# Altium PCB CW308T_K24F.PcbDoc
Units mil, origin at the board's own origin, x right, y up, seen from the top; angles counter-clockwise.
Board outline 2055 x 2540 mil, 2 copper layers (Component Side, Bottom Layer), stack 12.8 mil thick; 30 components, 81 nets, 269 pads, 89 vias.
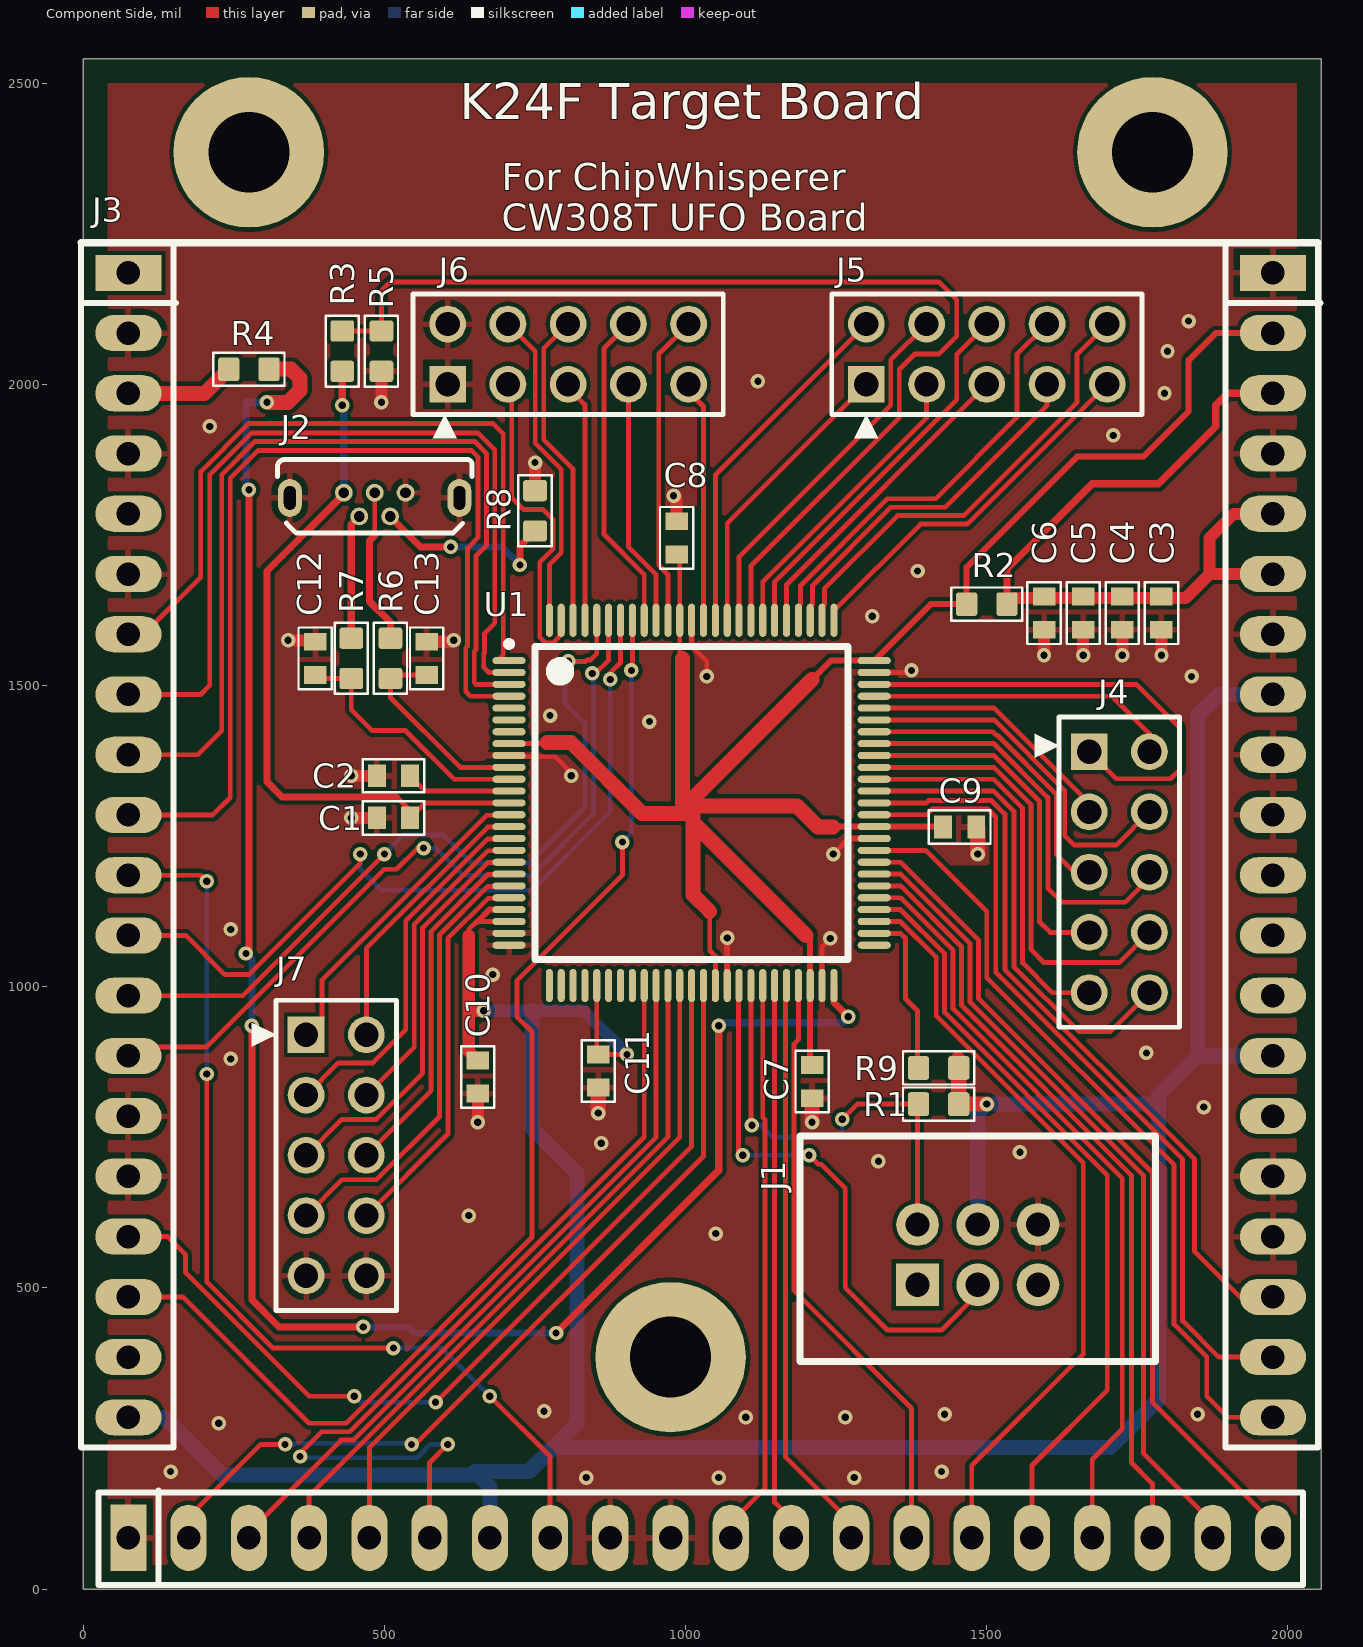
[diagram p0: Component Side view]
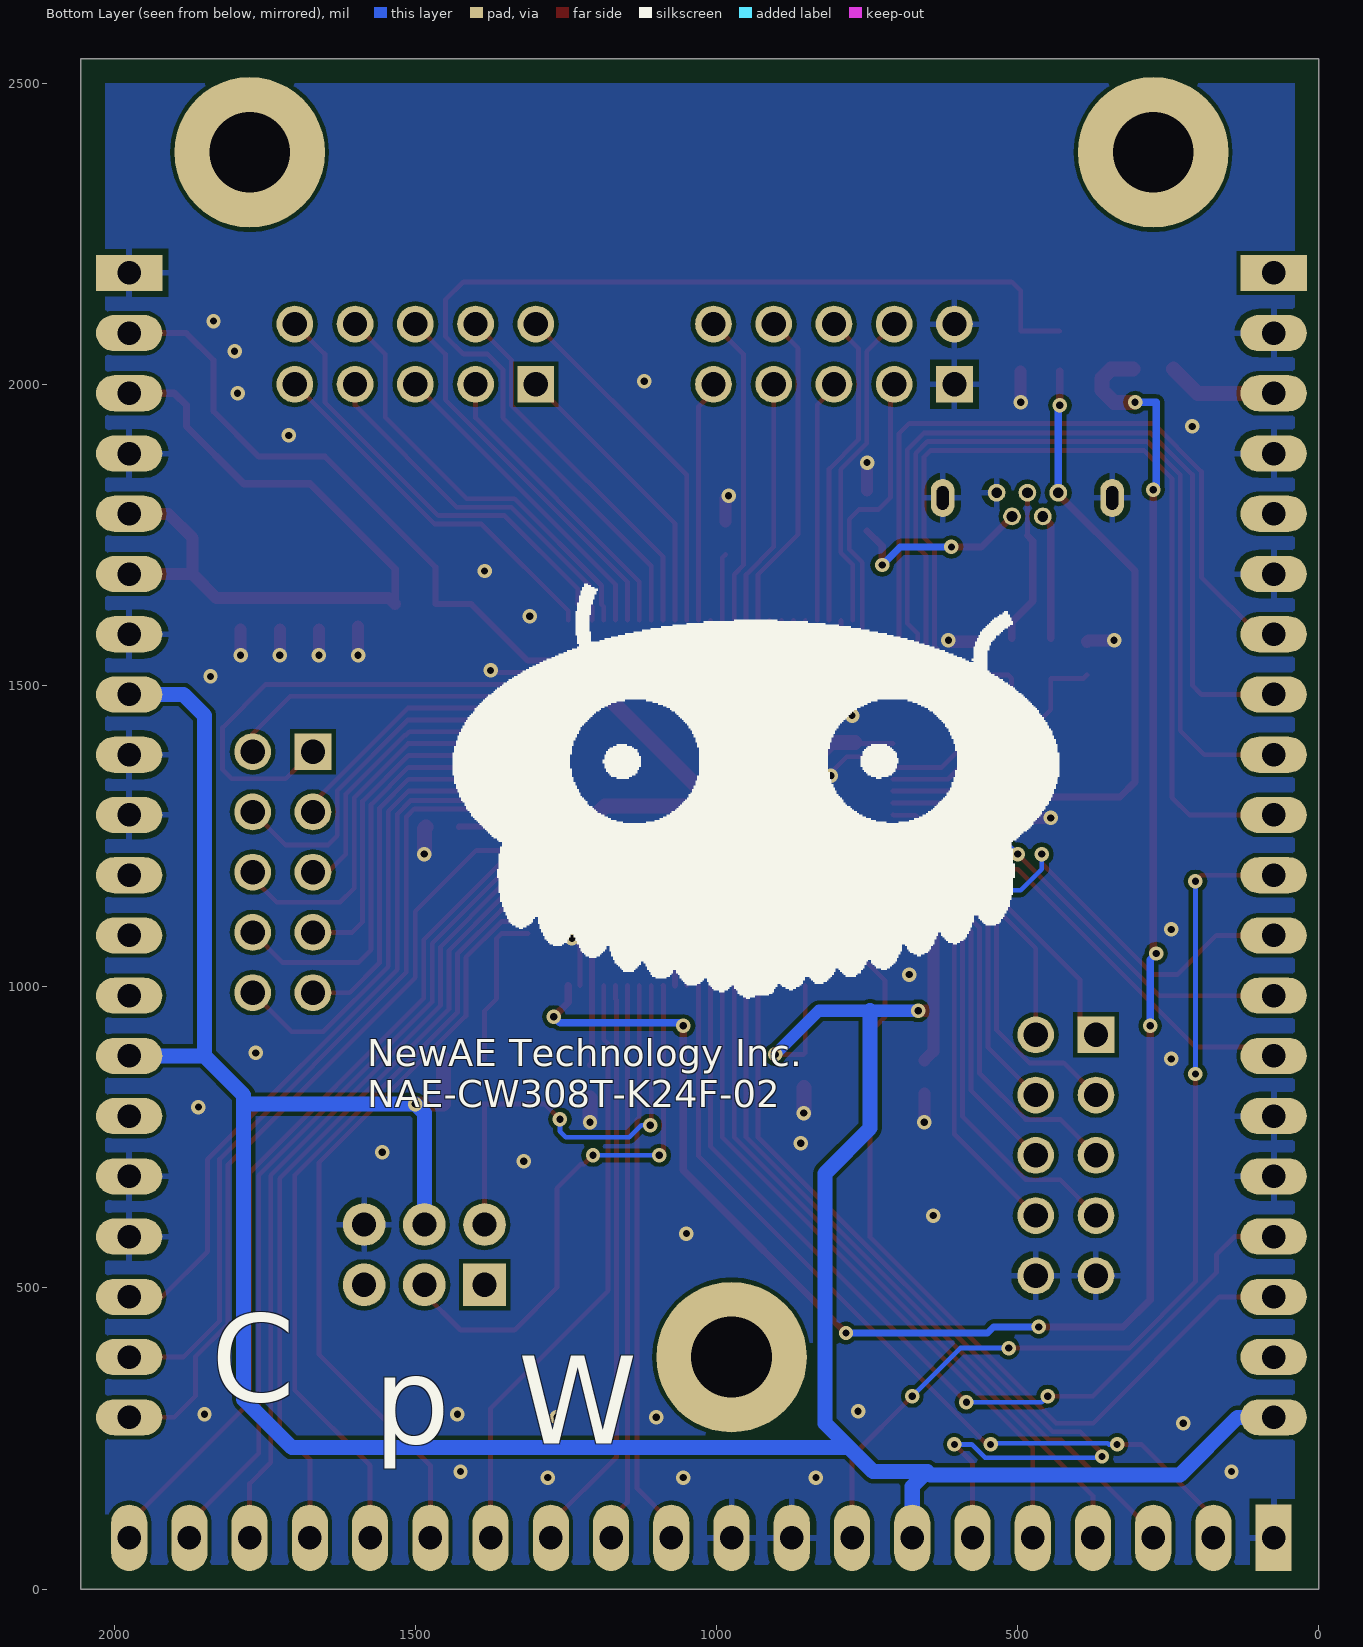
[diagram p1: Bottom Layer view, seen from below]

## Layer stack, top to bottom
Top Solder: solder mask 0.4, Solder Resist, Dk 3.5
Component Side: signal copper 1.4
Dielectric 1: core 10, FR-4, Dk 4.2
Bottom Layer: signal copper 1.4
Solder Side: solder mask 0.4, Solder Resist, Dk 3.5

## Board outline
0,0 2055,0 2055,2540 0,2540

## Design rules (kind name [scope] priority, off if disabled: settings)
BoardOutlineClearance Silk_to_Outline [(OnLayer('Top Overlay'))] p1: gap=0 ignorepadtopadclearanceinfootprint=FALSE
BoardOutlineClearance [All] p2: gap=40 ignorepadtopadclearanceinfootprint=FALSE
Clearance Clearance_Power [InNet('+*') OR InNet('-*') OR InNet('GND')] p1: gap=7 ignorepadtopadclearanceinfootprint=FALSE
Clearance [All] p2: gap=6 ignorepadtopadclearanceinfootprint=FALSE except(0: Arc-Hole Track-Hole SMDPad-Hole THPad-Hole Via-Hole Fill-Hole Poly-Hole Region-Hole Text-Hole)
HoleSize [All] p1: absolutevalues=TRUE maxlimit=200 minlimit=1 maxpercent=80.000 minpercent=20.000
MinimumSolderMaskSliver [All] p1: minsoldermaskwidth=5
PlaneConnect PlaneConnect_viaDirect [IsVia] p1: planeconnectstyle=Direct reliefexpansion=20 reliefentries=4 reliefconductorwidth=10 reliefairgap=10
PlaneConnect [All] p2: planeconnectstyle=Relief reliefexpansion=20 reliefentries=4 reliefconductorwidth=10 reliefairgap=10
PolygonConnect PolygonConnect_viaDirect [All vs isVia] p1: connectstyle=Direct reliefconductorwidth=10 reliefentries=4 polygonreliefangle="90 Angle" airgapwidth=10
PolygonConnect [All] p2: connectstyle=Relief reliefconductorwidth=10 reliefentries=4 polygonreliefangle="90 Angle" airgapwidth=10
RoutingVias [All] p1: holewidth=28 width=24 viastyle="Through Hole" minholewidth=12 minwidth=24 maxholewidth=12 maxwidth=50
SilkToSilkClearance [All] p1: silktosilkclearance=5
SilkToSolderMaskClearance [IsPad] p1: minsilkscreentomaskgap=5 clearancetoexposedcopper=TRUE
SolderMaskExpansion [All] p1: expansion=4
Width [All] p1: maxlimit=100 minlimit=6 preferedwidth=8 minimp=50.000000 maximp=50.000000 favimp=50.000000
25 further rules are at their usual default settings.

## Classes and differential pairs
component class CW308T_K24_Micro: J1 J4 J5 J6 J7 R1 U1 U?
component class CW308T_K24_UFO: J3
component class CW308T_K24_Misc: C1 C2 C3 C4 C5 C6 C7 C8 C9 C10 C11 C12 C13 C17 J2 R2 R3 R4 R5 R6 R7 R8 R9 U?

## Components (designator, comment, footprint, x,y, rotation, side; value= is the part's Value field where it differs from the comment)
C1 "2u2" CAPC0603_M 515,1280 r180 top
C2 "2u2" CAPC0603_M 515,1350 r180 top
C3 "2u2" CAPC0603_M 1790,1620 r270 top
C4 "2u2" CAPC0603_M 1725,1620 r270 top
C5 "100n" CAPC0603_M 1660,1620 r270 top
C6 "100n" CAPC0603_M 1595,1620 r270 top
C7 "100n" CAPC0603_M 1210,842.44 r270 top
C8 "100n" CAPC0603_M 985,1745 r90 top
C9 "100n" CAPC0603_M 1455,1265 r0 top
C10 "100n" CAPC0603_M 655,850 r270 top
C11 "100n" CAPC0603_M 855,860 r270 top
C12 "47p" CAPC0603_M 385,1545 r90 top
C13 "47p" CAPC0603_M 570,1545 r90 top
J1 "HDR, Male, 6-Pin, 2 Row, Shrouded" HDR_6PIN_2ROW_SHROUD 1485,555 r90 top
J2 "614105150721" 614105150721 432.64,1820 r0 top
J3 "CW308_TARGETCON" CW308_TBOARD_CONN 75,2185 r0 top locked
J4 "MTSW-105-07-L-D-230" SMTC-MTSW-105-07-X-D-230 1670,1390 r270 top
J5 "MTSW-105-07-L-D-230" SMTC-MTSW-105-07-X-D-230 1300,2000 r0 top
J6 "MTSW-105-07-L-D-230" SMTC-MTSW-105-07-X-D-230 605,2000 r0 top
J7 "MTSW-105-07-L-D-230" SMTC-MTSW-105-07-X-D-230 370,920 r270 top
R1 "10k" RESC1608X55N 1420,805 r0 top
R2 "10R" RESC1608X55N 1500,1635 r180 top
R3 "47k" RESC1608X55N 430,2055 r90 top
R4 "10R" RESC1608X55N 275,2025 r180 top
R5 "68k" RESC1608X55N 495,2055 r270 top
R6 "33R" RESC1608X55N 510,1545 r90 top
R7 "33R" RESC1608X55N 445,1545 r270 top
R8 "1k5" RESC1608X55N 750,1790 r90 top
R9 "10k" RESC1608X55N 1420,865 r0 top
U1 "MK24FN1M0VLL12" SQFP50P1600X1600X170-100N 1010,1305 r0 top

## Footprints (in the part's own frame and the unit in brackets; to place one, negate y for a bottom-side part, rotate by r counter-clockwise, add the part's x,y. Pads: shape width x height; smd on the part's side, far side on the other; paste and mask are expansions set on the pad)
614105150721 [mm] "Upright USB"
  round 0.75 hole 0.45: 1(0,0) 2(0.65,-1) 3(1.3,0) 4(1.95,-1) 5(2.6,0)
  rrect100% 1x1.6 hole 0.5 slot 1 at 90 deg: S1(-2.275,-0.22) S2(4.875,-0.22)
  silkscreen extent -2.8,-1.7 5.4,1.4, body extent -2.7,-1.6 5.3,1.3, height 5.66
CAPC0603_M [mm]
  rect 0.75x0.95 smd: 1(-0.7,0) 2(0.7,0)
  silkscreen extent -1.3,-0.7 1.3,0.7, body extent -0.85,-0.45 0.85,0.45, height 0.9
CW308_TBOARD_CONN [mil]
  rect 110x60 hole 39: A1(0,0) C1(1900,0)
  oval 110x60 hole 39: A2(0,-100) A3(0,-200) A4(0,-300) A5(0,-400) A6(0,-500) A7(0,-600) A8(0,-700) A9(0,-800) A10(0,-900) A11(0,-1000) A12(0,-1100) A13(0,-1200) A14(0,-1300) A15(0,-1400) A16(0,-1500) A17(0,-1600) A18(0,-1700) A19(0,-1800) A20(0,-1900) C2(1900,-100) C3(1900,-200) C4(1900,-300) C5(1900,-400) C6(1900,-500) C7(1900,-600) C8(1900,-700) C9(1900,-800) C10(1900,-900) C11(1900,-1000) C12(1900,-1100) C13(1900,-1200) C14(1900,-1300) C15(1900,-1400) C16(1900,-1500) C17(1900,-1600) C18(1900,-1700) C19(1900,-1800) C20(1900,-1900)
  rect 60x110 hole 39: B1(0,-2100)
  oval 60x110 hole 39: B2(100,-2100) B3(200,-2100) B4(300,-2100) B5(400,-2100) B6(500,-2100) B7(600,-2100) B8(700,-2100) B9(800,-2100) B10(900,-2100) B11(1000,-2100) B12(1100,-2100) B13(1200,-2100) B14(1300,-2100) B15(1400,-2100) B16(1500,-2100) B17(1600,-2100) B18(1700,-2100) B19(1800,-2100) B20(1900,-2100)
  round 250 hole 134: MH1(200,200) MH2(900,-1800) MH2(1700,200)
  silkscreen extent -79,-2179 1979,50, body extent -50,-2149 1950,50, height 48
HDR_6PIN_2ROW_SHROUD [mm] "6-pin header, male, with shroud"
  rect 1.8x1.8 hole 1.02: 1(-1.27,2.54)
  round 1.8 hole 1.02: 2(1.27,2.54) 3(-1.27,0) 4(1.27,0) 5(-1.27,-2.54) 6(1.27,-2.54)
  silkscreen extent -4.5,-7.5 5,7.5, body extent -4.44,-7.41 4.83,7.42, height 9.32
RESC1608X55N [mm] "Chip Resistor, Body 1.6x0.8mm, EIA 0603, IPC Medium Density"
  round 0.254 on Mech15: 0(0,0)
  rrect25% 0.9x1 smd: 1(-0.85,0) 2(0.85,0)
  Component Side pour cut-out: -0.6,0.5 0.6,0.5 0.6,-0.5 -0.6,-0.5
  silkscreen extent -1.5,-0.7 1.5,0.7, body extent -0.87,-0.47 0.88,0.48, height 0.54
SMTC-MTSW-105-07-X-D-230 [mm] "Assembly .025\" [.64] SQ Post Terminal Strip, 2x5 Pins, Vertical, 2.54mm Pitch, Male"
  rect 1.55x1.55 hole 1.02: 1(0,0)
  round 1.55 hole 1.02: 2(0,2.54) 3(2.54,0) 4(2.54,2.54) 5(5.08,0) 6(5.08,2.54) 7(7.62,0) 8(7.62,2.54) 9(10.16,0) 10(10.16,2.54)
  silkscreen extent -1.46,-1.27 11.62,3.81, body extent -1.27,-1.27 11.43,3.81, height 8.38
SQFP50P1600X1600X170-100N [mm] "SQFP, 100-Leads, Body 14.00x14.00mm, Pitch 0.50mm, IPC Medium Density"
  oval 1.4x0.3 smd paste-0.051: 1(-7.7,6) 2(-7.7,5.5) 3(-7.7,5) 4(-7.7,4.5) 5(-7.7,4) 6(-7.7,3.5) 7(-7.7,3) 8(-7.7,2.5) 9(-7.7,2) 10(-7.7,1.5) 11(-7.7,1) 12(-7.7,0.5) 13(-7.7,0) 14(-7.7,-0.5) 15(-7.7,-1) 16(-7.7,-1.5) 17(-7.7,-2) 18(-7.7,-2.5) 19(-7.7,-3) 20(-7.7,-3.5) 21(-7.7,-4) 22(-7.7,-4.5) 23(-7.7,-5) 24(-7.7,-5.5) 25(-7.7,-6) 51(7.7,-6) 52(7.7,-5.5) 53(7.7,-5) 54(7.7,-4.5) 55(7.7,-4) 56(7.7,-3.5) 57(7.7,-3) 58(7.7,-2.5) 59(7.7,-2) 60(7.7,-1.5) 61(7.7,-1) 62(7.7,-0.5) 63(7.7,0) 64(7.7,0.5) 65(7.7,1) 66(7.7,1.5) 67(7.7,2) 68(7.7,2.5) 69(7.7,3) 70(7.7,3.5) 71(7.7,4) 72(7.7,4.5) 73(7.7,5) 74(7.7,5.5) 75(7.7,6)
  oval 0.3x1.4 smd paste-0.051: 26(-6,-7.7) 27(-5.5,-7.7) 28(-5,-7.7) 29(-4.5,-7.7) 30(-4,-7.7) 31(-3.5,-7.7) 32(-3,-7.7) 33(-2.5,-7.7) 34(-2,-7.7) 35(-1.5,-7.7) 36(-1,-7.7) 37(-0.5,-7.7) 38(0,-7.7) 39(0.5,-7.7) 40(1,-7.7) 41(1.5,-7.7) 42(2,-7.7) 43(2.5,-7.7) 44(3,-7.7) 45(3.5,-7.7) 46(4,-7.7) 47(4.5,-7.7) 48(5,-7.7) 49(5.5,-7.7) 50(6,-7.7) 76(6,7.7) 77(5.5,7.7) 78(5,7.7) 79(4.5,7.7) 80(4,7.7) 81(3.5,7.7) 82(3,7.7) 83(2.5,7.7) 84(2,7.7) 85(1.5,7.7) 86(1,7.7) 87(0.5,7.7) 88(0,7.7) 89(-0.5,7.7) 90(-1,7.7) 91(-1.5,7.7) 92(-2,7.7) 93(-2.5,7.7) 94(-3,7.7) 95(-3.5,7.7) 96(-4,7.7) 97(-4.5,7.7) 98(-5,7.7) 99(-5.5,7.7) 100(-6,7.7)
  silkscreen extent -7.82,-6.6 6.6,6.82, body extent -8,-8 8,8, height 1.7

## Part data
C1 C2 C3 C4: library part CCHIP-2u2-0603, "2u2, 0603", Case-EIA=0603, Case-Metric=1608, Manufacture 1=Samsung, Manufacture Part Number 1=CL10B225KP8NNNC, Rated Voltage=10VDC, Supplier Part Number 1=1276-1134-2-ND, Component Group=Capacitor, Component Type=Standard, Mounting Technology=SMT, Part Number=CCHIP-2u2-0603, Pin Count=2, Supplier 1=Digi-Key
C5 C6 C7 C8 C9 C10 C11: library part CCHIP-100n-0603, "100n, 0603", Case-EIA=0603, Case-Metric=1608, Manufacture 1=Kemet, Manufacture Part Number 1=C0603C104K5RACTU, Rated Voltage=50VDC, Supplier Part Number 1=399-5089-2-ND, Component Group=Capacitor, Component Type=Standard, Mounting Technology=SMT, Part Number=CCHIP-100n-0603, Pin Count=2, Supplier 1=Digi-Key
C12 C13: library part CCHIP-47p-0603, "47p, 0603", Case-EIA=0603, Case-Metric=1608, Component Group=Capacitor, Component Type=Standard, Mounting Technology=SMT, Part Number=CCHIP-47p-0603, Pin Count=2
J1: library part HDR_6PIN_2ROW_SHROUD, Manufacture 1="FCI Connectors", Manufacture Part Number 1=75869-131LF, Supplier Part Number 1=609-2845-ND, Component Group=Connector, Component Type=Standard, Mounting Technology=Through-hole, Part Number=HDR_6PIN_2ROW_SHROUD, Pin Count=6, RoHS=Yes, Supplier 1=Digi-Key
J2: "USB, 5-pin, Upright", Manufacture 1="Wurth Electronics", Supplier Part Number 1=732-5958-1-ND, Component Group=Connector, Component Type=Standard, Manufacture Part Number 1=614105150721, Mounting Technology=Through-hole, Part Number=614105150721, Pin Count=7, PP Material Stack=0, PP Rotation=0, RoHS=Yes, Supplier 1=Digi-Key
J3: library part CW308_TBOARD, "CW308 \"Standard\" Target Board Connector", Component Group=Mechanical, Component Type=Standard, Mounting Technology=Through-hole, Part Number=CW308_TBOARD, Pin Count=60, Pitch=2.54mm
J4 J5 J6 J7: library part CMP-1024-00115-1, Manufacturer=Samtec, Temperature Range="-55 to 125 degC", ComponentLink1Description="Manufacturer URL", ComponentLink1URL=http://www.samtec.com, ComponentLink2Description=Datasheet, ComponentLink2URL=http://www.samtec.com/documents/webfiles/pdf/MTSW.PDF, ComponentLink3Description="Package Specification", ComponentLink3URL=http://www.samtec.com/documents/webfiles/cpdf/MTSW-XXX-XX-X-X-XXXX-XX-XXX-MKT1.pdf, DatasheetVersion=F-214, Mounting Technology=Through-hole, Orientation=Vertical, PackageReference=MTSW-105-07-X-D-230, PackageVersion="BI, 2/1987", PartNumber=MTSW-105-07-L-D-230, Pitch="2.54 mm", RoHS=True
R1 R9: library part RCHIP-10K-0603, "10k res, 0603, 1%, 1/10W", Case-EIA=0603, Case-Metric=1608, Manufacture 1=Yageo, Manufacture Part Number 1=RC0603FR-0710KL, Rated Power=0.1W, Rated Voltage=75VDC, Supplier Part Number 1=311-10.0KHRCT-ND, Temperature Range="-55C to 155C", Tolerance=1%, Component Group=Resistor, Component Type=Standard, Mounting Technology=SMT, Part Number=RCHIP-10K-0603, Pin Count=2, Supplier 1=Digi-Key
R2 R4: library part RCHIP-10R-0603, "10R res, 0603, 1%, 1/10W", Case-EIA=0603, Case-Metric=1608, Manufacture 1=Yageo, Manufacture Part Number 1=RC0603FR-0710RL, Rated Power=0.1W, Rated Voltage=75VDC, Supplier Part Number 1=311-10.0HRCT-ND, Temperature Range="-55C to 155C", Tolerance=1%, Component Group=Resistor, Component Type=Standard, Mounting Technology=SMT, Part Number=RCHIP-10R-0603, Pin Count=2, Supplier 1=Digi-Key
R3: library part RCHIP-47K-0603, "47k res, 0603, 1%, 1/10W", Case-EIA=0603, Case-Metric=1608, Manufacture 1=Yageo, Manufacture Part Number 1=RC0603FR-0747KL, Rated Power=0.1W, Rated Voltage=75VDC, Supplier Part Number 1=311-47.0KHRCT-ND, Temperature Range="-55C to 155C", Tolerance=1%, Component Group=Resistor, Component Type=Standard, Mounting Technology=SMT, Part Number=RCHIP-47K-0603, Pin Count=2, Supplier 1=Digi-Key
R5: library part RCHIP-68K-0603, "68k res, 0603, 1%, 1/10W", Case-EIA=0603, Case-Metric=1608, Manufacture 1=Yageo, Manufacture Part Number 1=RC0603FR-0768KL, Rated Power=0.1W, Rated Voltage=75VDC, Supplier Part Number 1=311-68.0KHRCT-ND, Temperature Range="-55C to 155C", Tolerance=1%, Component Group=Resistor, Component Type=Standard, Mounting Technology=SMT, Part Number=RCHIP-68K-0603, Pin Count=2, Supplier 1=Digi-Key
R6 R7: library part RCHIP-33R-0603, "33R res, 0603, 1%, 1/10W", Case-EIA=0603, Case-Metric=1608, Manufacture 1=Yageo, Manufacture Part Number 1=RC0603FR-0733RL, Rated Power=0.1W, Rated Voltage=75VDC, Supplier Part Number 1=311-33.0HRCT-ND, Temperature Range="-55C to 155C", Tolerance=1%, Component Group=Resistor, Component Type=Standard, Mounting Technology=SMT, Part Number=RCHIP-33R-0603, Pin Count=2, Supplier 1=Digi-Key
R8: library part RCHIP-1K5-0603, "1k5 res, 0603, 1%, 1/10W", Case-EIA=0603, Case-Metric=1608, Manufacture 1=Yageo, Manufacture Part Number 1=RC0603FR-071K5L, Rated Power=0.1W, Rated Voltage=75VDC, Supplier Part Number 1=311-1.50KHRCT-ND, Temperature Range="-55C to 155C", Tolerance=1%, Component Group=Resistor, Component Type=Standard, Mounting Technology=SMT, Part Number=RCHIP-1K5-0603, Pin Count=2, Supplier 1=Digi-Key
U1: Manufacture 1=NXP, Component Group="Digital IC", Component Type=Standard, Manufacture Part Number 1=MK24FN1M0VLL12, Part Number=MK24FN1M0VLL12, Pin Count=100, PP Material Stack=0, PP Rotation=0

## Via types
v1: diameter 24, hole 12, Component Side to Bottom Layer, tented both sides, 89 vias

## Nets (pads, with @x,y where several pads share a name; then routed paths per layer and width w, separated by ;. In a path a pad name is that pad's centre, name@x,y a point inside that pad or via, vN(x,y) a via of type N, cw(c..) or ccw(c..) an arc to the next point about the centre after c; other vN are vias at no path point)
CAN0_RX: J1.2 R1.1 U1.43 | length 752.5
  Component Side w8: U1.43 1108.43,771.57 v1(1110,770) ; v1(1260,780) 1285,805 R1.1 1385,803.46 J1.2
  Bottom Layer w8: v1(1110,770) 1125,770 1145,750 1250,750 1260,760 v1(1260,780)
CAN0_TX: J1.3 U1.42 | length 931.7
  Component Side w8: U1.42 1088,1001.11 1088,727 v1(1095,720) ; v1(1205,720) 1220,705 1225,705 1265,665 1265,500 1335,430 1425,430 1485,490 J1.3
  Bottom Layer w8: v1(1095,720) v1(1205,720)
CLKIN: J3.A3 R4.2 | length 183.1
  Component Side w25: J3.A3 201.54,1985 R4.2
CS: J3.A18 U1.93 | length 1998.7
  Component Side w8: J3.A18 165,485 374.8,275.2 436.31,275.2 745,583.89 745,925 720,950 720,1010 895,1185 v1(895,1240) ; v1(910,1525) 911.57,1526.57 U1.93
  Bottom Layer w8: v1(895,1240) 910,1255 v1(910,1525)
EZP_CS_b: J3.A17 U1.38 | length 1509.4
  Component Side w8: J3.A17 140,585 170,555 170,525 375,320 v1(450,320) ; v1(585,310) 1010,735 U1.38
  Bottom Layer w8: v1(450,320) 460,310 v1(585,310)
GND: C1.2 C2.2 C3.2 C4.2 C5.2 C6.2 C7.2 C8.2 C9.2 C10.2 C11.2 C12.2 C13.2 J1.6 J2.5 J2.S1 J2.S2 J3.A2 J3.A4 J3.A6 J3.A15 J3.A16 J3.B1 J3.B9 J3.B10 J3.C1 J3.C4 J3.C7 J3.C9 J3.C10 J3.C16 J3.C17 J6.1 J6.2 J7.9 J7.10 R5.2 R8.2 U1.9 U1.24 U1.25 U1.41 U1.49 U1.60 U1.74 U1.88 | length 1198.6
  Component Side w8: U1.9 709.09,1381.5 783.5,1381.5 810,1355 v1(810,1350) ; U1.88 1010,1565 1035,1540 v1(1035,1515) ; U1.49 1226.54,1066.54 v1(1240,1080) ; v1(1245,1220) 1270.94,1245.94 U1.60 ; U1.74 1371.54,1521.54 v1(1375,1525)
  Component Side w10: U1.41 v1(1069.06,1080.94)
  Component Side w20: v1(340,1575) 382.56,1575 C12.2 ; v1(445,1280) C1.2 ; v1(445,1350) C2.2 ; v1(495,1970) R5.2 ; C13.2 612.56,1572.56 v1(615,1575) ; v1(655,775) C10.2 ; R8.2 v1(750,1870) ; v1(980,1815) 985,1810 C8.2 ; v1(1595,1550) C6.2@1595,1597.44 ; v1(1660,1550) C5.2 ; v1(1725,1550) C4.2 ; v1(1790,1550) C3.2
  Component Side w25: v1(855,790) C11.2 ; v1(1210,775) C7.2 ; C9.2 1485,1262.56 v1(1485,1220)
  other v1: 835,185 1055,185 1280,185 145,195 1425,195 225,275 1100,285 1265,285 1430,290 1850,290 765,295 1050,590 640,620 1320,710 1555,725 860,740 1860,800 245,880 1765,890 680,1020 245,1095 940,1440 775,1450 1840,1515 1310,1615 1385,1690 1710,1915 210,1930 1795,1985 1120,2005 1800,2055 1835,2105
GPIO1_TX: J3.A7 U1.1 | length 1273.4
  Component Side w8: J3.A7 100,1585 195,1680 195,1855 275,1935 680,1935 697.25,1917.75 697.25,1551.04 689.2,1542.98 690.96,1541.22 U1.1
GPIO2_RX: J3.A8 U1.2 | length 1418.8
  Component Side w8: J3.A8 195,1485 210,1500 210,1850 279,1919 655.6,1919 683.25,1891.35 683.25,1603.25 666,1586 666,1553.88 665,1552.88 665,1530 673.46,1521.54 U1.2
GPIO3: J3.A9 U1.3 | length 1514.8
  Component Side w8: J3.A9 190,1385 230,1425 230,1850 285,1905 649.8,1905 669.25,1885.55 669.25,1732.25 652,1715 652,1559.67 649,1556.67 649,1505 652.15,1501.85 U1.3
GPIO4: J3.A10 U1.4 | length 1618.8
  Component Side w8: J3.A10 215,1285 244,1314 244,1844 290,1890 645,1890 655.25,1879.75 655.25,1745.25 638,1728 638,1565.47 635,1562.47 635,1490 642.83,1482.17 U1.4
HDR1_I2S_RXCLK: J3.B11 U1.44 | length 942.1
  Component Side w8: J3.B11 1075,110 1132,167 1132,779.11 1128.11,783 U1.44
HDR2_I2S_RXD: J3.B12 U1.45 | length 928.1
  Component Side w8: U1.45 1147.8,143.65 1175,116.45 J3.B12
HDR3_I2S_RXFS: J3.B13 U1.46 | length 962.6
  Component Side w8: U1.46 1167.48,979.17 1166,977.69 1166,219 1275,110 J3.B13
HDR4: J3.B14 U1.47 | length 1000.6
  Component Side w8: U1.47 1187.17,912.17 1180,905 1180,495 1375,300 J3.B14
HDR5: J3.B15 U1.53 | length 1268.9
  Component Side w8: U1.53 1356.65,1108.15 1416,1048.8 1416,951.41 1660,707.41 1660,390 1475,205 J3.B15
HDR6: J3.B16 U1.54 | length 1280.4
  Component Side w8: U1.54 1356.76,1127.83 1430,1054.6 1430,957.21 1700,687.21 1700,330 1575,205 J3.B16
HDR7: J3.B17 U1.55 | length 1279.4
  Component Side w8: U1.55 1356.88,1147.52 1444,1060.4 1444,963.01 1725,682.01 1725,265 1675,215 J3.B17
HDR8: J3.B18 U1.56 | length 1299.2
  Component Side w8: U1.56 1356.99,1167.2 1458,1066.2 1458,968.81 1740,686.81 1740,210 1775,175 J3.B18
HDR9: J3.B19 U1.57 | length 1360.4
  Component Side w8: U1.57 1357.1,1186.89 1472,1071.99 1472,974.61 1760,686.61 1760,225 1875,110 J3.B19
HDR10: J3.B20 U1.58 | length 1421.5
  Component Side w8: U1.58 1357.22,1206.57 1486,1077.79 1486,980.41 1775,691.41 1775,310 1975,110 J3.B20
JTAG_TCK: J3.B6 U1.34 | length 1467.7
  Component Side w8: v1(360,220) 360,225 396.2,261.2 442.11,261.2 931.26,750.35 U1.34 ; J3.B6 575,210 v1(605,240)
  Bottom Layer w8: v1(360,220) 362,218 554.11,218 576.11,240 v1(605,240)
JTAG_TDI: J3.B3 U1.35 | length 1217.8
  Component Side w8: J3.B3 275,110 290.91,110 428.11,247.2 447.91,247.2 950.94,750.23 U1.35
JTAG_TDO: J3.B4 U1.36 | length 1163.6
  Component Side w8: J3.B4 375,154.49 970.63,750.12 U1.36
JTAG_TMS: J3.B5 U1.37 | length 1130.3
  Component Side w8: J3.B5 475,234.69 990.32,750.01 U1.37
JTAG_TRST: J3.B2 U1.39 | length 1440.5
  Component Side w8: J3.B2@175,74.07 J3.B2 175,120 295,240 v1(335,240) ; v1(545,240) 551.04,240 1029.68,718.64 U1.39
  Bottom Layer w8: v1(335,240) 335,245 340,240 348.89,240 350.89,242 543,242 v1(545,240)
LED1: J3.C18 U1.63 | length 1245.8
  Component Side w8: U1.63 1400.04,1305 1404.04,1309 1507.38,1309 1530,1286.38 1530,1028.4 1845,713.4 1845,560 1920,485 J3.C18
LED2: J3.C19 U1.62 | length 1351.3
  Component Side w8: U1.62 1400.15,1285.32 1409.83,1295 1501.58,1295 1515,1281.58 1515,1023.6 1825,713.6 1825,445 1885,385 J3.C19
LED3: J3.C20 U1.59 | length 1309.5
  Component Side w8: U1.59 1398.74,1226.26 1500,1125 1500,1015 1811,704 1811,439.2 1865,385.2 1865,320 1900,285 J3.C20
MISO: J3.A13 U1.96 | length 1292.7
  Component Side w8: J3.A13 265,985 v1(500,1220) ; v1(805,1540) 833.89,1540 835.89,1542 842,1542 852.52,1552.52 U1.96
  Bottom Layer w8: v1(500,1220) 532,1252 598,1252 645,1205 740,1205 833,1298 833,1437 800,1470 800,1535 v1(805,1540)
MOSI: J3.A14 U1.95 | length 1312
  Component Side w8: J3.A14 90,900 205,900 500,1195 520,1195 555,1230 v1(565,1230) ; v1(845,1520) 850,1520 872.2,1542.2 U1.95
  Bottom Layer w8: v1(565,1230) 585,1230 630,1185 745,1185 847,1287 847,1518 v1(845,1520)
NetC1_1: C1.1 J2.1 R3.1 U1.13 | length 1179.8
  Component Side w8: 520,1315 542.56,1292.44 C1.1 567.56,1305 U1.13
  Component Side w12: v1(430,1965) R3.1 ; J2.1 432.64,1817.64 305,1690 305,1340 330,1315 520,1315
  Bottom Layer w12: v1(430,1965) 432.64,1962.36 J2.1
NetC2_1: C2.1 U1.12 | length 174.8
  Component Side w8: C2.1 567.87,1324.68 U1.12
NetC12_1: C12.1 R7.2 U1.11 | length 423.7
  Component Side w8: C12.1 390.91,1511.54 R7.2 445,1460 480,1425 535,1425 615.63,1344.37 U1.11
NetC13_1: C13.1 R6.1 U1.10 | length 338.9
  Component Side w8: C13.1 515.91,1517.44 R6.1 510,1480 625.94,1364.06 U1.10
NetJ2_2: J2.2 R7.1 | length 207.6
  Component Side w12: R7.1 445,1767.4 J2.2
NetJ2_3: J2.3 R6.2 | length 259.7
  Component Side w8: 483.82,1748.82 J2.3
  Component Side w12: 483.82,1748.82 475,1740 475,1640 510,1605 R6.2
NetJ2_4: J2.4 R8.1 | length 315.9
  Component Side w12: J2.4 560,1730 v1(610,1730) ; v1(725,1700) 725,1731.54 R8.1
  Bottom Layer w12: v1(610,1730) 695,1730 v1(725,1700)
NetJ4_1: J4.1 U1.73 | length 781.5
  Component Side w8: U1.73 1748.15,1501.85 1820,1430 1820,1360 1805,1345 1715,1345 J4.1
NetJ4_2: J4.2 U1.72 | length 512.6
  Component Side w8: U1.72 1707.83,1482.17 1770,1420 J4.2
NetJ4_3: J4.3 U1.71 | length 436.9
  Component Side w8: U1.71 1512.29,1462.48 1670,1304.77 J4.3
NetJ4_4: J4.4 U1.70 | length 609.6
  Component Side w8: U1.70 1512.18,1442.8 1629.49,1325.48 1629.49,1250.51 1645,1235 1715,1235 J4.4
NetJ4_5: J4.5 U1.69 | length 512.1
  Component Side w8: U1.69 1509.98,1423.11 1515.67,1417.43 1517.75,1417.43 1615.49,1319.68 1615.49,1219.51 1645,1190 J4.5
NetJ4_6: J4.6 U1.68 | length 680.6
  Component Side w8: U1.68 1511.95,1403.43 1601.49,1313.89 1601.49,1163.51 1625,1140 1730,1140 1770,1180 J4.6
NetJ4_7: J4.7 U1.67 | length 596
  Component Side w8: U1.67 1511.83,1383.74 1587.49,1308.09 1587.49,1107.51 1605,1090 J4.7
NetJ4_8: J4.8 U1.66 | length 752.8
  Component Side w8: U1.66 1511.72,1364.06 1573.49,1302.29 1573.49,1061.51 1595,1040 1720,1040 J4.8
NetJ4_9: J4.9 U1.65 | length 654.2
  Component Side w8: U1.65 1511.61,1344.37 1559.49,1296.49 1559.49,1039.49 1608.98,990 J4.9
NetJ4_10: J4.10 U1.64 | length 800.4
  Component Side w8: U1.64 1511.49,1324.68 1545,1291.18 1545,1033.2 1653.2,925 1705,925 J4.10
NetJ7_1: J7.1 U1.14 | length 526.2
  Component Side w8: J7.1 396.51,946.51 396.51,1011.51 669.59,1284.59 706.12,1284.59 U1.14
NetJ7_2: J7.2 U1.15 | length 464.1
  Component Side w8: J7.2 470,1063.59 671.31,1264.9 706.12,1264.9 U1.15
NetJ7_3: J7.3 U1.16 | length 619.4
  Component Side w8: J7.3 423.49,873.49 480.78,873.49 535.39,928.1 535.39,1109.19 671.42,1245.22 706.12,1245.22 U1.16
NetJ7_4: J7.4 U1.17 | length 524.6
  Component Side w8: J7.4 549.39,899.39 549.39,1103.39 671.54,1225.53 706.12,1225.53 U1.17
NetJ7_5: J7.5 U1.18 | length 679.9
  Component Side w8: J7.5 429.49,779.49 486.78,779.49 563.39,856.1 563.39,1097.59 671.65,1205.85 706.12,1205.85 U1.18
NetJ7_6: J7.6 U1.19 | length 585.1
  Component Side w8: J7.6 577.39,827.39 577.39,1091.79 671.76,1186.16 706.12,1186.16 U1.19
NetJ7_7: J7.7 U1.20 | length 740.4
  Component Side w8: J7.7 429.49,679.49 486.78,679.49 591.39,784.1 591.39,1085.99 671.88,1166.48 706.12,1166.48 U1.20
NetJ7_8: J7.8 U1.21 | length 645.6
  Component Side w8: J7.8 605.39,755.39 605.39,1080.19 671.99,1146.79 706.12,1146.79 U1.21
NetR4_1: R4.1 U1.50 | length 3106.9
  Component Side w6: v1(305,1970) v1@310,1970
  Component Side w12: v1(270,1055) 275,1060 v1(275,1825) ; v1(280,935) 280,480 325,435 v1(465,435) ; v1(785,425) 1055,695 v1(1055,935) ; U1.50 1246.22,973.78 v1(1270,950)
  Component Side w25: R4.1 345,2025 360,2010 360,1990 340,1970 v1@310,1970
  Bottom Layer w12: v1(270,1055) 280,1045 v1(280,935) ; v1(275,1825) 270,1830 270,1970 v1(305,1970) ; v1(465,435) 540,435 550,425 v1(785,425) ; v1(1055,935) 1060,940 1260,940 v1(1270,950)
NetR9_1: R9.1 U1.52 | length 263.6
  Component Side w8: U1.52 1356.54,1088.46 1365,1080 1365,980 1385,960 R9.1@1385,880
NRST: J3.A11 J3.B8 | length 1629.3
  Component Side w8: J3.A11 195,1185 v1(205,1175) ; v1(205,855) 205,510 315,400 v1(515,400) ; v1(675,320) 775,220 J3.B8
  Bottom Layer w8: v1(205,855) v1(205,1175) ; v1@510,400 v1(515,400) 595,400 v1(675,320)
PTC4: J5.9 U1.76 | length 625.4
  Component Side w8: U1.76 1246.22,1624.04 1390.1,1767.92 1467.92,1767.92 J5.9
PTC5: J5.10 U1.77 | length 752.4
  Component Side w8: U1.77 1226.54,1630.83 1230.32,1634.61 1230.32,1660.32 1351.92,1781.92 1461.92,1781.92 1650,1970 1650,2050 J5.10
PTC6: J5.7 U1.78 | length 607.5
  Component Side w8: U1.78 1206.85,1630.83 1210.63,1634.61 1210.63,1665.83 1340.72,1795.92 1430.92,1795.92 1600,1965 J5.7
PTC7: J5.8 U1.79 | length 709.7
  Component Side w8: U1.79 1187.17,1630.83 1190.94,1634.61 1190.94,1665.94 1334.92,1809.92 1414.92,1809.92 1550,1945 1550,2050 J5.8
PTC8: J5.5 U1.80 | length 529.6
  Component Side w8: U1.80 1167.48,1667.48 J5.5
PTC9: J5.6 U1.81 | length 637.7
  Component Side w8: U1.81 1147.8,1672.18 1450,1974.39 1450,2050 J5.6
PTC10: J5.3 U1.82 | length 504.5
  Component Side w8: U1.82 1128.11,1672.3 1400,1944.19 J5.3
PTC12: J5.4 U1.84 | length 620.8
  Component Side w8: U1.84 1088.74,1713.57 1340.51,1965.35 1340.51,2040.51 J5.4
PTC13: J5.1 U1.85 | length 487.5
  Component Side w8: U1.85 1069.06,1769.06 J5.1
PTC14: J5.2 U1.86 | length 595.7
  Component Side w8: U1.86 1049.37,1849.37 J5.2
PTC15: J6.9 U1.87 | length 402.1
  Component Side w8: J6.9 1005,1987.79 1029.68,1963.11 U1.87
PTC16: J6.10 U1.90 | length 518.8
  Component Side w8: U1.90 970.63,1684.2 955.3,1699.53 955.3,2050.3 J6.10
PTC17: J6.7 U1.91 | length 410.9
  Component Side w8: J6.7 905,1730.04 950.94,1684.09 U1.91
PTC18: J6.8 U1.92 | length 536.3
  Component Side w8: J6.8 864.49,2059.49 864.49,1750.75 931.26,1683.98 U1.92
PTD4: J6.5 U1.97 | length 403.4
  Component Side w8: J6.5 805,1994.09 832.83,1966.26 U1.97
PTD5: J6.6 U1.98 | length 528.8
  Component Side w8: J6.6 764.49,2059.49 764.49,1907.84 813.15,1859.18 U1.98
PTD6: J6.3 U1.99 | length 548.4
  Component Side w8: J6.3 711.25,1993.75 711.25,1811.85 731.22,1791.88 763.61,1791.88 779.68,1775.8 779.68,1726.13 757.87,1704.32 757.87,1579.91 767.19,1570.59 780.37,1570.59 789.68,1579.91 789.68,1581.69 793.46,1585.46 U1.99
PTD7: J6.4 U1.100 | length 536.8
  Component Side w8: J6.4 750.49,2054.51 750.49,1902.04 793.68,1858.84 793.68,1720.33 773.78,1700.42 U1.100
SCK: J3.A12 U1.94 | length 1337
  Component Side w8: J3.A12 170,1085 235,1020 275,1020 460,1205 v1(460,1220) ; v1(875,1510) 875,1521.11 891.89,1538 U1.94
  Bottom Layer w8: v1(460,1220) 460,1195 495,1160 745,1160 875,1290 v1(875,1510)
SHUNTH: C3.1 C4.1 C5.1 C6.1 J3.C3 J3.C5 J3.C6 R2.1 | length 1285.1
  Component Side w12: R2.1 1533.46,1693.46 1675,1835 1785,1835 1880,1930 1880,1965 1900,1985 J3.C3
  Component Side w20: R2.1 1543.46,1645 1830,1645 1870,1685 ; J3.C6 1870,1685 ; J3.C5 1910,1785 1870,1745 1870,1685
SHUNTL: C7.1 C8.1 C9.1 J3.C2 R2.2 U1.8 U1.40 U1.48 U1.61 U1.75 U1.89 | length 3410.6
  Component Side w8: U1.8 768.43,1403.43 770,1405 ; C8.1 990.32,1712.13 U1.89 990.32,1549.68 995,1545 ; 1040,1125 1040,1060 1049.37,1050.63 U1.40
  Component Side w10: 1200,1085 1206.85,1078.15 U1.48 1206.85,873.15 C7.1 ; 1210,1510 1241.22,1541.22 U1.75 1406.93,1635 R2.2 1466.54,1696.54 1650,1880 1760,1880 1835,1955 1835,2040 1880,2085 J3.C2 ; 1245,1265 1245.63,1265.63 U1.61 C9.1@1426.81,1265.63 ; C9.1 C9.1@1426.81,1265.63 ; C9.1@1427.44,1265.63 C9.1@1426.81,1265.63
  Component Side w25: 770,1405 810,1405 927.5,1287.5 1012.5,1287.5 ; 995,1545 995,1305 1000,1300 ; 1040,1125 1012.5,1152.5 1012.5,1272.5 ; 1200,1085 1012.5,1272.5 ; 1210,1510 1000,1300 ; 1245,1265 1220,1265 1185,1300 1000,1300 ; 1000,1300 1012.5,1287.5 ; 1012.5,1272.5 1012.5,1287.5
VBUS_DETECT: R3.2 R5.1 U1.83 | length 1801.9
  Component Side w8: R3.2 R5.1 495,2155 510,2170 1420,2170 1450,2140 1450,2080 1420,2050 1380,2050 1354.51,2024.51 1354.51,1944.36 1108.43,1698.28 U1.83
VCC: C10.1 C11.1 J1.4 J3.A20 J3.B7 J3.C8 J3.C14 R1.2 R9.2 U1.22 U1.23 U1.30 | length 5549.2
  Component Side w8: 640,1085 640,1095 653.15,1108.15 654.56,1108.15 U1.23 ; U1.30 852.52,890.04 C11.1 v1(902.56,887.56)
  Component Side w10: 653.86,1107.44 654.56,1108.15 674.25,1127.83 U1.22
  Component Side w20: 640,1085 640,965 ; C10.1 640,892.56 640,965 ; v1(665,960) 645,960 640,965
  Component Side w25: R9.2@1451.93,880 1453.46,878.46 R1.2 v1(1500,805)
  Bottom Layer w20: v1(665,960) 745,960 830.12,960 v1(902.56,887.56)
  Bottom Layer w25: J3.A20 135,285 230.5,189.5 644.5,189.5 650,195 ; J3.B7 675,170 650,195 ; 745,960 745,765 820,690 820,275 780,235 ; J1.4 1485,790 v1(1500,805) 1785,805 ; J3.C14 1850,885 ; J3.C8 1885,1485 1850,1450 1850,885 ; 650,195 740,195 780,235 ; 780,235 1705,235 1785,315 1785,805 ; 1785,805 1785,820 1850,885
pads on no net: J1.1 J1.5 J3.A1 J3.A5 J3.A19 J3.C11 J3.C12 J3.C13 J3.C15 J3.MH1 J3.MH2 R1.0 R2.0 R3.0 R4.0 R5.0 R6.0 R7.0 R8.0 R9.0 U1.5 U1.6 U1.7 U1.26 U1.27 U1.28 U1.29 U1.31 U1.32 U1.33 U1.51

## Polygon pours and split planes (outlines as drawn)
GND on Bottom Layer "GND" (solid, pour order 2): -5,2780
GND on Bottom Layer "GND" (solid, remove dead copper, pour order 0): 0,2540 2055,2540 2055,0 0,0
GND on Component Side "GND" (solid, remove dead copper, pour order 4): 0,2540 2055,2540 2055,0 0,0

## Silkscreen, mask and mechanical layers (free items; w line width, h text height)
Top Overlay:
  region: 600,1950 610,1930 620,1910 580,1910
  region: 1300,1950 1310,1930 1320,1910 1280,1910
  region: 1620,1400 1600,1390 1580,1380 1580,1420
  region: 320,920 300,910 280,900 280,940
  lines w11.81: -3.74,2235 2050,2235
  text "K24F Target Board" at 625,2440 h60
  text "For ChipWhisperer / CW308T UFO Board" at 695,2255 h45
Bottom Overlay:
  drawing of 3 lines, arcs and shapes, not listed
  text "NewAE Technology Inc. / NAE-CW308T-K24F-02" at 1580,800 h45
  text "C" at 1839,263 h250
  text "W" at 1329,193 h250
  text "p" at 1569,193 h250
Mechanical 1:
  the board outline again, w10